# Allegro board io_4di_4aic.brd
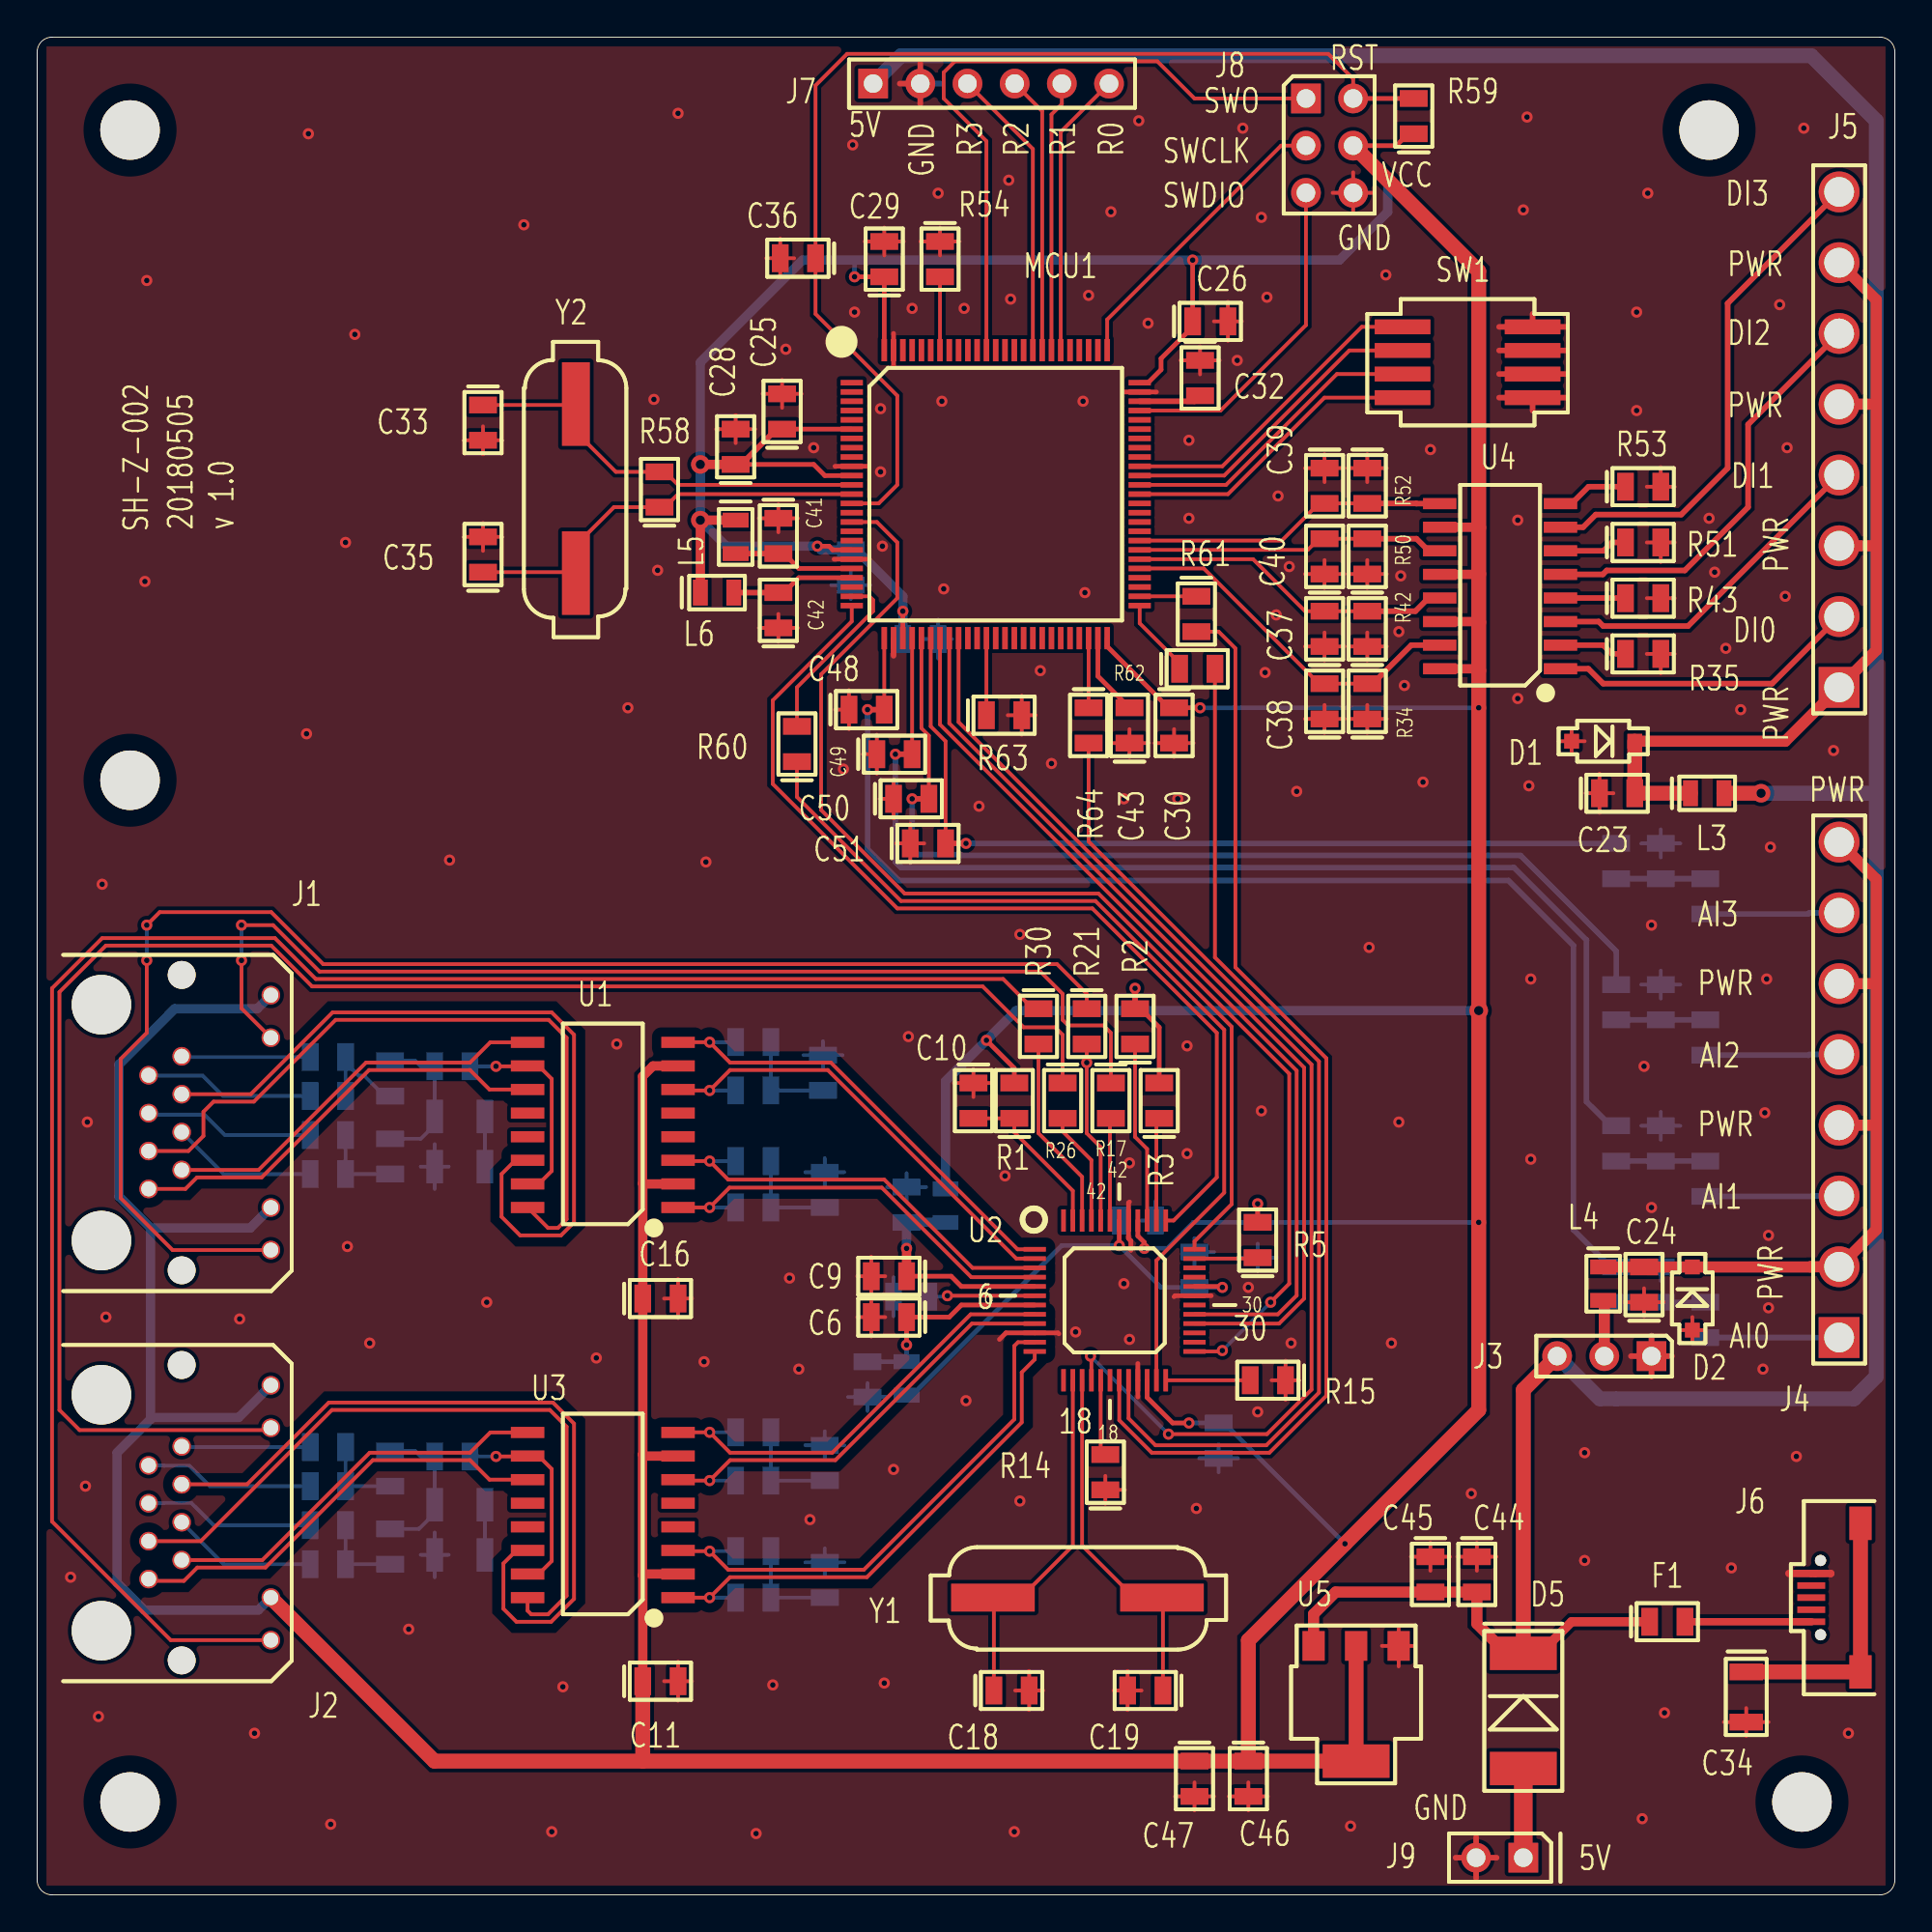
[diagram p0: board, top side]
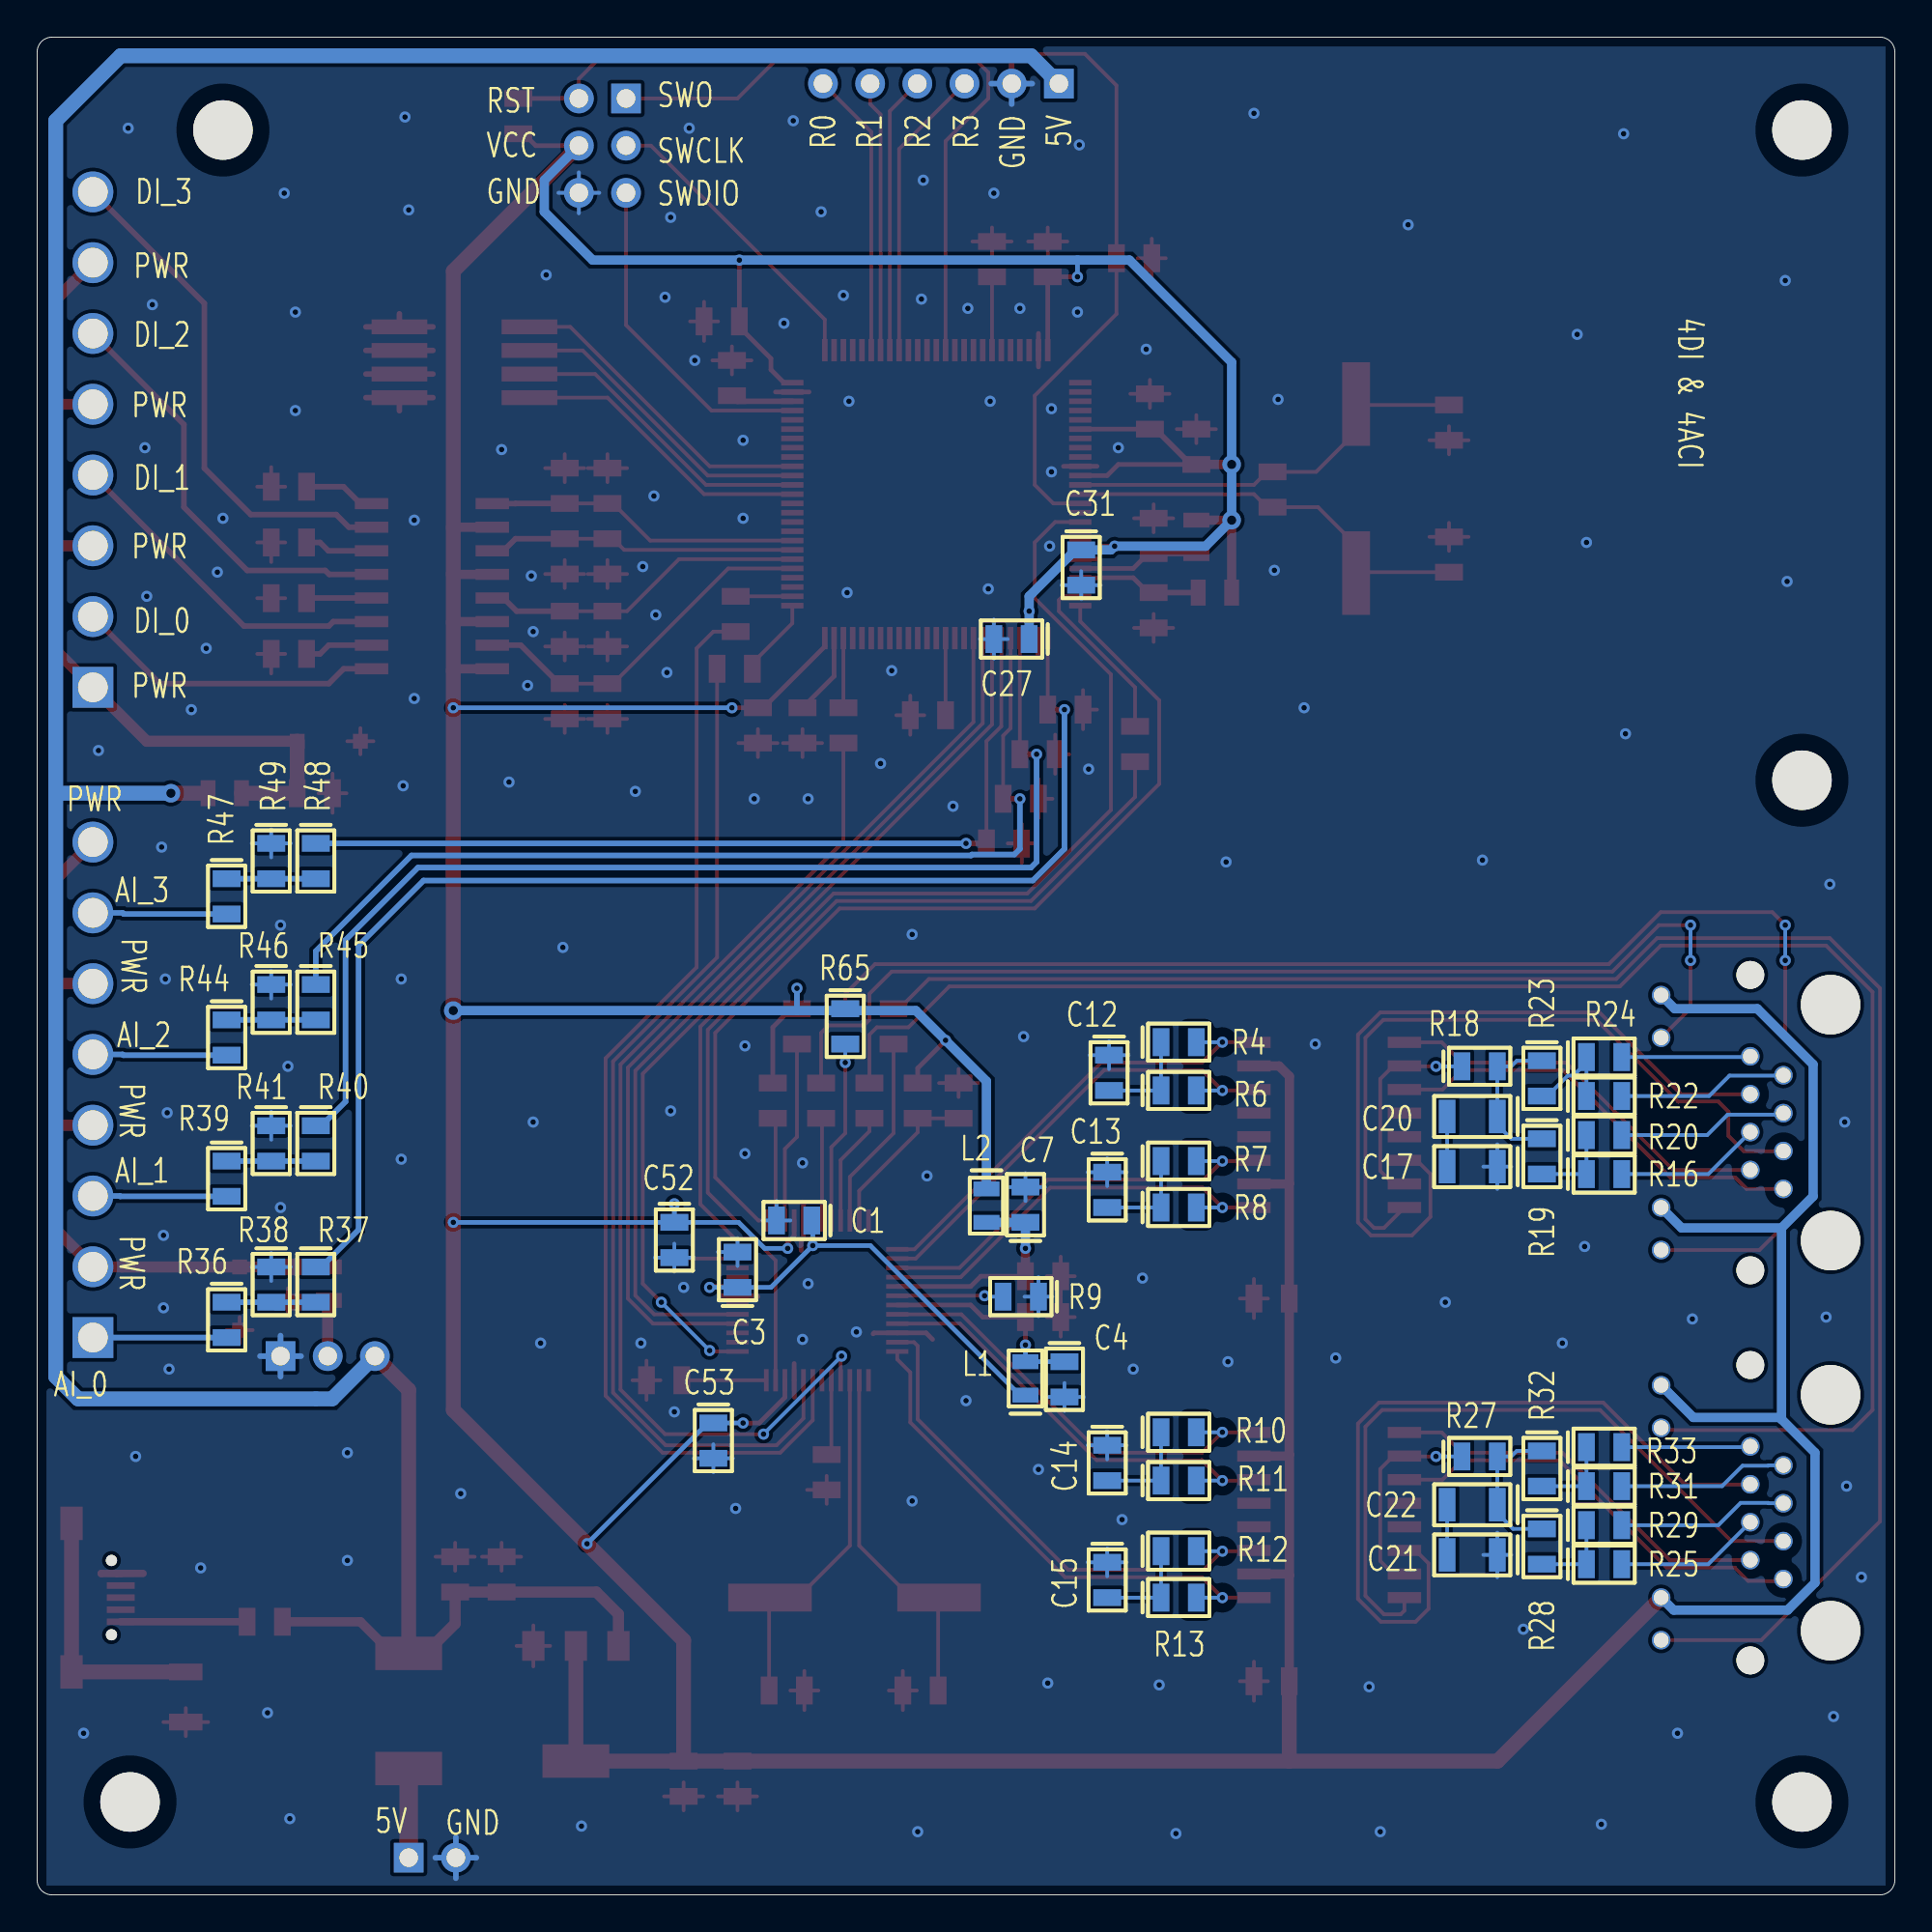
[diagram p1: board, bottom side, seen from below]

Outline 100 x 100 mm; copper layers: TOP, BOTTOM. Coordinates in mm from the lower left corner of the outline.
Outline path: 0,99.2 0,0.8 arc(0.23,0.23) 0.8,0 99.2,0 arc(99.77,0.23) 100,0.8 100,99.2 arc(99.77,99.77) 99.2,100 0.8,100 arc(0.23,99.77) 0,99.2

## Design rules (mm)
constraint set DEFAULT: pair gap 0.2
net group DP_RJ45_RX1: nets RX1M RX1P
net group DP_RJ45_RX2: nets RX2M RX2P
net group DP_RJ45_TX1: nets TX1M TX1P
net group DP_RJ45_TX2: nets TX2M TX2P
net group DP_RX1: nets RXM1 RXP1
net group DP_RX2: nets RXM2 RXP2
net group DP_TX1: nets TXM1 TXP1
net group DP_TX2: nets TXM2 TXP2

## Placement (name value [footprint] x y rotation side)
C1  47uF  [SMD_C_0805]  58.3 36.3 270 bottom
C3  100nF  [SMD_C_0805]  62.3 32.7 0 bottom
C4  47uF  [SMD_C_0805]  44.7 28.7 180 bottom
C6  100nF  [SMD_C_0805]  46.8 31.1 270 top
C7  47uF  [SMD_C_0805]  46.8 36.2 0 bottom
C9  100nF  [SMD_C_0805]  46.8 33.3 270 top
C10  100nF  [SMD_C_0805]  50.4 43.7 0 top
C11  10uF  [SMD_C_0805]  32.6 11.5 90 top
C12  100nF  [SMD_C_0805]  42.3 45.2 180 bottom
C13  100nF  [SMD_C_0805]  42.4 38.9 180 bottom
C14  100nF  [SMD_C_0805]  42.4 24.2 180 bottom
C15  100nF  [SMD_C_0805]  42.4 17.9 180 bottom
C16  10uF  [SMD_C_0805]  32.6 32.1 90 top
C17  1nF/2KV  [SMD_C_1206]  21.4 39.2 270 bottom
C18  18pF  [SMD_C_0805]  51.5 11 90 top
C19  18pF  [SMD_C_0805]  60.6 11 270 top
C20  1nF/2KV  [SMD_C_1206]  21.4 41.9 270 bottom
C21  1nF/2KV  [SMD_C_1206]  21.4 18.3 270 bottom
C22  1nF/2KV  [SMD_C_1206]  21.4 21 270 bottom
C23  100nF  [SMD_C_0805]  84.1 59.3 90 top
C24  100nF  [SMD_C_0805]  86.5 31.9 180 top
C25  100nF  [SMD_C_0805]  40.1 78.9 180 top
C26  100nF  [SMD_C_0805]  62.2 84.7 90 top
C27  100nF  [SMD_C_0805]  46.6 67.6 270 bottom
C28  100nF  [SMD_C_0805]  37.6 77 180 top
C29  100nF  [SMD_C_0805]  45.6 87.1 180 top
C30  100nF  [SMD_C_0805]  61.2 63.9 0 top
C31  100nF  [SMD_C_0805]  43.8 72.4 180 bottom
C32  10uF  [SMD_C_0805]  62.6 82.6 0 top
C33  22pF  [SMD_C_0805]  24 80.2 0 top
C34  1nF/2KV  [SMD_C_1206]  92 12 0 top
C35  22pF  [SMD_C_0805]  24 71.2 180 top
C36  100nF  [SMD_C_0805]  41.9 88.1 270 top
C37  100nF  [SMD_C_0805]  69.3 67.2 180 top
C38  100nF  [SMD_C_0805]  69.3 63.3 180 top
C39  100nF  [SMD_C_0805]  69.3 76.8 0 top
C40  100nF  [SMD_C_0805]  69.3 71.1 180 top
C41  100nF  [SMD_C_0805]  39.9 74.1 0 top
C42  100nF  [SMD_C_0805]  39.9 68.2 180 top
C43  10uF  [SMD_C_0805]  58.8 62 180 top
C44  100nF  [SMD_C_0805]  77.5 18.2 0 top
C45  10uF  [SMD_C_0805]  75 18.2 0 top
C46  47uF  [SMD_C_0805]  65.2 7.2 0 top
C47  47uF  [SMD_C_0805]  62.3 7.2 0 top
C48  100nF  [SMD_C_0805]  43.7 63.8 90 top
C49  100nF  [SMD_C_0805]  45.2 61.4 90 top
C50  100nF  [SMD_C_0805]  46.1 59 90 top
C51  100nF  [SMD_C_0805]  47 56.6 90 top
C52  100nF  [SMD_C_0805]  65.7 36.2 180 bottom
C53  100nF  [SMD_C_0805]  63.6 25.4 180 bottom
D1  5.1V  [SOD123]  86 62.1 270 top
D2  5.1V  [SOD123]  89.1 33.8 0 top
D5  1N5822  [DO-214AB]  80 13 0 top
F1  500mA  [SMD_R_0805]  86.8 14.7 90 top
J1  ETH1  [RJ45-T-568A-LED]  6 38 270 top
J2  ETH2  [RJ45-T-568A-LED]  6 17 270 top
J3  PWR_Select  [C1X3]  86.9 29 270 top
J4  4~20mA  [C1X8_P381]  97 30 180 top
J5  4~20mA  [C1X8_P381]  97 65 180 top
J6  USB_Socket  [MICROUSB_2FIX]  95.5 16 90 top
J7  Relay  [C1X6]  45 97.5 90 top
J8  SWD  [C2X3]  68.3 96.7 0 top
J9  PWR  [C1X2]  80 2 270 top
L1  bead  [SMD_L_0805]  46.8 26.9 0 bottom
L2  bead  [SMD_L_0805]  48.9 38 180 bottom
L3  bead  [SMD_L_0805]  89 59.3 90 top
L4  bead  [SMD_L_0805]  84.3 33.8 0 top
L5  bead  [SMD_L_0805]  37.6 74 0 top
L6  bead  [SMD_L_0805]  35.7 70.1 90 top
MCU1  STM32F407VET6  [LQFP100]  51.6 75.4 0 top
NOREF  -  [unnamed]  95 5 0 top
NOREF#2  -  [unnamed]  90 95 0 top
NOREF#3  -  [unnamed]  5 95 0 top
NOREF#4  -  [unnamed]  5 5 0 top
NOREF#5  -  [unnamed]  5 60 0 top
R1  10K  [SMD_R_0805]  52.6 41.8 180 top
R2  1K  [SMD_R_0805]  59.1 45.8 180 top
R3  1K  [SMD_R_0805]  60.4 41.8 180 top
R4  50R  [SMD_R_0805]  39.5 45.9 90 bottom
R5  4.7K  [SMD_R_0805]  65.7 34.3 180 top
R6  50R  [SMD_R_0805]  39.5 43.3 90 bottom
R7  50R  [SMD_R_0805]  39.5 39.5 90 bottom
R8  50R  [SMD_R_0805]  39.5 37 90 bottom
R9  11.8K/1%  [SMD_R_0805]  46.1 32.2 270 bottom
R10  50R  [SMD_R_0805]  39.5 24.9 90 bottom
R11  50R  [SMD_R_0805]  39.5 22.3 90 bottom
R12  50R  [SMD_R_0805]  39.5 18.5 90 bottom
R13  50R  [SMD_R_0805]  39.5 16 90 bottom
R14  1K  [SMD_R_0805]  57.5 21.8 180 top
R15  1K  [SMD_R_0805]  67.2 27.7 270 top
R16  50R  [SMD_R_0805]  16.6 38.8 90 bottom
R17  1K  [SMD_R_0805]  57.8 43.7 0 top
R18  75R  [SMD_R_0805]  23.3 44.6 90 bottom
R19  50R  [SMD_R_0805]  19 40.7 180 bottom
R20  50R  [SMD_R_0805]  16.6 40.9 90 bottom
R21  1K  [SMD_R_0805]  56.5 47.7 0 top
R22  50R  [SMD_R_0805]  16.6 43 90 bottom
R23  50R  [SMD_R_0805]  19 44.9 180 bottom
R24  50R  [SMD_R_0805]  16.6 45.1 90 bottom
R25  50R  [SMD_R_0805]  16.6 17.8 90 bottom
R26  1K  [SMD_R_0805]  55.2 43.7 0 top
R27  75R  [SMD_R_0805]  23.3 23.6 90 bottom
R28  50R  [SMD_R_0805]  19 19.7 180 bottom
R29  50R  [SMD_R_0805]  16.6 19.9 90 bottom
R30  1K  [SMD_R_0805]  53.9 47.7 0 top
R31  50R  [SMD_R_0805]  16.6 22 90 bottom
R32  50R  [SMD_R_0805]  19 23.9 180 bottom
R33  50R  [SMD_R_0805]  16.6 24.1 90 bottom
R34  2K  [SMD_R_0805]  71.6 63.3 180 top
R35  150R  [SMD_R_0805]  85.5 66.8 90 top
R36  50R  [SMD_R_0805]  89.8 31.9 180 bottom
R37  3K3  [SMD_R_0805]  85 33.8 180 bottom
R38  100R  [SMD_R_0805]  87.4 33.8 180 bottom
R39  50R  [SMD_R_0805]  89.8 39.5 180 bottom
R40  3K3  [SMD_R_0805]  85 41.4 180 bottom
R41  100R  [SMD_R_0805]  87.4 41.4 180 bottom
R42  2K  [SMD_R_0805]  71.6 67.2 180 top
R43  150R  [SMD_R_0805]  85.5 69.8 90 top
R44  50R  [SMD_R_0805]  89.8 47.1 180 bottom
R45  3K3  [SMD_R_0805]  85 49 180 bottom
R46  100R  [SMD_R_0805]  87.4 49 180 bottom
R47  50R  [SMD_R_0805]  89.8 54.7 180 bottom
R48  3K3  [SMD_R_0805]  85 56.6 180 bottom
R49  100R  [SMD_R_0805]  87.4 56.6 180 bottom
R50  2K  [SMD_R_0805]  71.6 71.1 180 top
R51  150R  [SMD_R_0805]  85.5 72.8 90 top
R52  2K  [SMD_R_0805]  71.6 76.8 0 top
R53  150R  [SMD_R_0805]  85.5 75.8 90 top
R54  10K  [SMD_R_0805]  48.6 89 0 top
R58  1M  [SMD_R_0805]  33.5 74.7 180 top
R59  10K  [SMD_R_0805]  74.1 94.8 180 top
R60  22R  [SMD_R_0805]  40.9 61 180 top
R61  22R  [SMD_R_0805]  62.4 69.9 0 top
R62  22R  [SMD_R_0805]  61.5 66 90 top
R63  10K  [SMD_R_0805]  51.1 63.5 90 top
R64  22R  [SMD_R_0805]  56.6 63.9 0 top
R65  4.7K  [SMD_R_0805]  56.5 47.7 180 bottom
SW1  reserved  [SMD_SW4]  77 82.5 0 top
U1  HR601680  [ETH_TRANS]  34.5 37 180 top
U2  KSZ8863RLL  [LQFP48]  58 32 0 top
U3  HR601680  [ETH_TRANS]  34.5 16 180 top
U4  PS2801-4/SM  [SOP16]  82 66 180 top
U5  AMS1117-33  [SOT-223]  71 10 180 top
Y1  25M  [CRYSTAL_2PIN_SMD]  56 16 180 top
Y2  8M  [CRYSTAL_2PIN_SMD]  29 75.7 90 top

## Library data of the parts
C1 C3 C4 C6 C7 C9 C10 C12-C15 C18 C19 C23-C33 C35-C53 = CAP NP
C11 C16 C17 C20-C22 C34 = CAP
D1 D2 = DIODE TVS
D5 = DIODE
F1 = FUSE
J1 J2 = RJ45-T-568A_1
J3 = C1X3
J4 J5 = C1X8Gen
J6 = MicroUSB_Socket
J7 = C1X6Gen
J8 = C2X3
J9 = C1X2
L1-L6 = INDUCTOR
MCU1 = STM32F407VET
R1-R54 R58-R65 = RESISTOR
SW1 = DIP_Switch4
U1 U3 = HR601680_1
U2 = KSZ8863RLL
U4 = PS2801-4/SM
U5 = AMS1117-33
Y1 Y2 = CRYSTAL

## Footprints (pads in the part's own frame, mm; a bottom-side part is the same pattern mirrored in y, then rotated)
C1X2
  rect 1.6x1.6 hole 1: 1(0,0)
  round 1.6 hole 1: 2(0,-2.54)
C1X3
  rect 1.6x1.6 hole 1: 1(0,0)
  round 1.6 hole 1: 2(0,-2.54) 3(0,-5.08)
C1X6
  rect 1.6x1.6 hole 1: 1(0,0)
  round 1.6 hole 1: 2(0,-2.54) 3(0,-5.08) 4(0,-7.62) 5(0,-10.16) 6(0,-12.7)
C1X8_P381
  rect 2.2x2.2 hole 1.6: 1(0,0)
  round 2.2 hole 1.6: 2(0,-3.81) 3(0,-7.62) 4(0,-11.43) 5(0,-15.24) 6(0,-19.05) 7(0,-22.86) 8(0,-26.67)
C2X3
  rect 1.6x1.6 hole 1: 1(0,0)
  round 1.6 hole 1: 2(0,-2.54) 3(0,-5.08) 4(2.54,-5.08) 5(2.54,-2.54) 6(2.54,0)
CRYSTAL_2PIN_SMD
  rect 4.5x1.5 smd: 1(-4.55,0) 2(4.55,0)
DO-214AB
  rect 3.6x1.8 smd: 1(0,0) 2(0,-6.2)
ETH_TRANS
  rect 1.8x0.6 smd: 1(0,0) 2(0,-1.27) 3(0,-2.54) 4(0,-3.81) 5(0,-5.08) 6(0,-6.35) 7(0,-7.62) 8(0,-8.89) 9(8.1,-8.89) 10(8.1,-7.62) 11(8.1,-6.35) 12(8.1,-5.08) 13(8.1,-3.81) 14(8.1,-2.54) 15(8.1,-1.27) 16(8.1,0)
LQFP48
  rect 1.2x0.25 smd: 1(-4.3,2.75) 2(-4.3,2.25) 3(-4.3,1.75) 4(-4.3,1.25) 5(-4.3,0.75) 6(-4.3,0.25) 7(-4.3,-0.25) 8(-4.3,-0.75) 9(-4.3,-1.25) 10(-4.3,-1.75) 11(-4.3,-2.25) 12(-4.3,-2.75) 25(4.3,-2.75) 26(4.3,-2.25) 27(4.3,-1.75) 28(4.3,-1.25) 29(4.3,-0.75) 30(4.3,-0.25) 31(4.3,0.25) 32(4.3,0.75) 33(4.3,1.25) 34(4.3,1.75) 35(4.3,2.25) 36(4.3,2.75)
  rect 0.25x1.2 smd: 13(-2.75,-4.3) 14(-2.25,-4.3) 15(-1.75,-4.3) 16(-1.25,-4.3) 17(-0.75,-4.3) 18(-0.25,-4.3) 19(0.25,-4.3) 20(0.75,-4.3) 21(1.25,-4.3) 22(1.75,-4.3) 23(2.25,-4.3) 24(2.75,-4.3) 37(2.75,4.3) 38(2.25,4.3) 39(1.75,4.3) 40(1.25,4.3) 41(0.75,4.3) 42(0.25,4.3) 43(-0.25,4.3) 44(-0.75,4.3) 45(-1.25,4.3) 46(-1.75,4.3) 47(-2.25,4.3) 48(-2.75,4.3)
LQFP100
  rect 1.2x0.3 smd: 1(-7.75,6) 2(-7.75,5.5) 3(-7.75,5) 4(-7.75,4.5) 5(-7.75,4) 6(-7.75,3.5) 7(-7.75,3) 8(-7.75,2.5) 9(-7.75,2) 10(-7.75,1.5) 11(-7.75,1) 12(-7.75,0.5) 13(-7.75,0) 14(-7.75,-0.5) 15(-7.75,-1) 16(-7.75,-1.5) 17(-7.75,-2) 18(-7.75,-2.5) 19(-7.75,-3) 20(-7.75,-3.5) 21(-7.75,-4) 22(-7.75,-4.5) 23(-7.75,-5) 24(-7.75,-5.5) 25(-7.75,-6) 51(7.75,-6) 52(7.75,-5.5) 53(7.75,-5) 54(7.75,-4.5) 55(7.75,-4) 56(7.75,-3.5) 57(7.75,-3) 58(7.75,-2.5) 59(7.75,-2) 60(7.75,-1.5) 61(7.75,-1) 62(7.75,-0.5) 63(7.75,0) 64(7.75,0.5) 65(7.75,1) 66(7.75,1.5) 67(7.75,2) 68(7.75,2.5) 69(7.75,3) 70(7.75,3.5) 71(7.75,4) 72(7.75,4.5) 73(7.75,5) 74(7.75,5.5) 75(7.75,6)
  rect 0.3x1.2 smd: 26(-6,-7.75) 27(-5.5,-7.75) 28(-5,-7.75) 29(-4.5,-7.75) 30(-4,-7.75) 31(-3.5,-7.75) 32(-3,-7.75) 33(-2.5,-7.75) 34(-2,-7.75) 35(-1.5,-7.75) 36(-1,-7.75) 37(-0.5,-7.75) 38(0,-7.75) 39(0.5,-7.75) 40(1,-7.75) 41(1.5,-7.75) 42(2,-7.75) 43(2.5,-7.75) 44(3,-7.75) 45(3.5,-7.75) 46(4,-7.75) 47(4.5,-7.75) 48(5,-7.75) 49(5.5,-7.75) 50(6,-7.75) 76(6,7.75) 77(5.5,7.75) 78(5,7.75) 79(4.5,7.75) 80(4,7.75) 81(3.5,7.75) 82(3,7.75) 83(2.5,7.75) 84(2,7.75) 85(1.5,7.75) 86(1,7.75) 87(0.5,7.75) 88(0,7.75) 89(-0.5,7.75) 90(-1,7.75) 91(-1.5,7.75) 92(-2,7.75) 93(-2.5,7.75) 94(-3,7.75) 95(-3.5,7.75) 96(-4,7.75) 97(-4.5,7.75) 98(-5,7.75) 99(-5.5,7.75) 100(-6,7.75)
MICROUSB_2FIX
  round 0.6 hole 0.6 unplated: (-2,-0.5) (2,-0.5)
  rect 0.35x1.5 smd: 1(-1.3,0) 2(-0.65,0) 3(0,0) 4(0.65,0) 5(1.3,0)
  rect 1.8x1.2 smd: 6(4,-2.65) 7(-4,-2.65)
RJ45-T-568A-LED
  round 1.5 hole 1.5 unplated: (-11.52,1.78) (4.38,1.78)
  round 3.2 hole 3.2 unplated: (-9.92,-2.54) (2.78,-2.54)
  round 1 hole 0.8: 1(0,0) 2(-1.02,1.78) 3(-2.04,0) 4(-3.06,1.78) 5(-4.08,0) 6(-5.1,1.78) 7(-6.12,0) 8(-7.14,1.78) 9(3.29,6.58) 10(1,6.58) 11(-8.14,6.58) 12(-10.43,6.58)
SMD_C_0805
  rect 1.5x0.9 smd: 1(0,0) 2(0,-1.9)
SMD_C_1206
  rect 1.8x0.9 smd: 1(0,0) 2(0,-2.7)
SMD_L_0805
  rect 1.4x0.8 smd: 1(0,0) 2(0,-1.8)
SMD_R_0805
  rect 1.5x0.9 smd: 1(0,0) 2(0,-1.9)
SMD_SW4
  rect 3x0.8 smd: 1(-3.5,1.905) 2(-3.5,0.635) 3(-3.5,-0.635) 4(-3.5,-1.905) 5(3.5,-1.905) 6(3.5,-0.635) 7(3.5,0.635) 8(3.5,1.905)
SOD123
  rect 0.8x0.8 smd: 1(0,0) 2(0,-3.4)
SOP16
  rect 1.8x0.6 smd: 1(0,0) 2(0,-1.27) 3(0,-2.54) 4(0,-3.81) 5(0,-5.08) 6(0,-6.35) 7(0,-7.62) 8(0,-8.89) 9(6.5,-8.89) 10(6.5,-7.62) 11(6.5,-6.35) 12(6.5,-5.08) 13(6.5,-3.81) 14(6.5,-2.54) 15(6.5,-1.27) 16(6.5,0)
SOT-223
  rect 1.2x1.6 smd: 1(-2.29,-3.4) 2(0,-3.4) 3(2.29,-3.4)
  rect 3.6x1.8 smd: 4(0,2.8)
unnamed
  round 3.2 hole 3.2 unplated: (0,0)

## Nets
1.8V: C1.1 C3.1 L1.1 U2.32 U2.42
3.3V: C11.1 C16.1 C25.1 C26.1 C27.1 C28.1 C29.1 C30.1 C31.1 C46.1 C47.1 C52.1 C53.1 J1.10 J1.12 J2.10 J2.12 J8.5 L2.1 L5.1 L6.1 MCU1.6 MCU1.11 MCU1.19 MCU1.28 MCU1.50 MCU1.75 MCU1.100 R1.2 R2.2 R3.2 R5.2 R59.1 R65.1 U1.2 U1.7 U2.22 U2.40 U3.2 U3.7 U4.10 U4.12 U4.14 U4.16 U5.2 U5.4(VOUT#4)
5V: C44.2 C45.2 D5.1(K) F1.1 J3.3(C) J7.1 L3.2 U5.3
GND: C1.2 C3.2 C4.2 C6.2 C7.2 C9.2 C10.1 C11.2 C12.1 C13.1 C14.1 C15.1 C16.2 C17.1 C18.2 C19.2 C21.1 C23.1 C24.1 C25.2 C26.2 C27.2 C28.2 C29.2 C30.2 C31.2 C32.1 C33.2 C34.2 C35.2 C36.2 C37.1 C38.1 C39.1 C40.1 C41.1 C42.1 C43.1 C44.1 C45.1 C46.2 C47.2 C48.1 C49.1 C50.1 C51.1 C52.2 C53.2 D1.2 D2.2 J3.1 J6.5 J7.2 J8.4 J9.2 MCU1.10 MCU1.20(VSSA) MCU1.27 MCU1.74 MCU1.99 R9.1 R14.1 R15.1 R34.1 R35.2 R38.1 R41.1 R42.1 R43.2 R46.1 R49.1 R50.1 R51.2 R52.1 R53.2 R54.1 R63.2 SW1.5 SW1.6 SW1.7 SW1.8 U2.10 U2.21 U2.31 U2.41 U5.1
GND_EARTH_1: C17.2 C20.2
GND_EARTH_2: C21.2 C22.2
VDDA: C42.2 L6.2 MCU1.22
VDDA_1.8: C4.1 C6.1 L1.2 U2.7
VDDA_3.3: C7.1 C9.1 L2.2 U2.5
AI_C_0: J4.1 R36.2
AI_C_0_CH_3: C48.2 MCU1.26 R37.1
AI_C_1: J4.3 R39.2
AI_C_1_CH_4: C49.2 MCU1.29 R40.1
AI_C_2: J4.5 R44.2
AI_C_2_CH_5: C50.2 MCU1.30 R45.1
AI_C_3: J4.7 R47.2
AI_C_3_CH_6: C51.2 MCU1.31 R48.1
AI_PWR_OUT: C24.2 D2.1(CATHODE) J4.2 J4.4 J4.6 J4.8 L4.1
CMT1: R18.1 U1.10 U1.15
CMT2: R27.1 U3.10 U3.15
DI_IN_0: J5.2 U4.1
DI_IN_1: J5.4 U4.3
DI_IN_2: J5.6 U4.5
DI_IN_3: J5.8 U4.7
DI_PWR_OUT: C23.2 D1.1(CATHODE) J5.1 J5.3 J5.5 J5.7 L3.1
DI_TTL_0: C38.2 MCU1.55 R34.2 U4.15
DI_TTL_1: C37.2 MCU1.56 R42.2 U4.13
DI_TTL_2: C40.2 MCU1.57 R50.2 U4.11
DI_TTL_3: C39.2 MCU1.58 R52.2 U4.9(EMITTER)
ETH1_LED0: R21.2 R65.2 U2.44
ETH1_LED1: R17.2 U2.43
ETH2_LED0: R30.2 U2.46
ETH2_LED1: R26.2 U2.45
ETH_CRS_DV: MCU1.32 U2.25
ETH_MDC: MCU1.16 U2.36
ETH_MDIO: MCU1.25 U2.37
ETH_REF_CLK: R60.1 U2.23
ETH_RXD0: MCU1.33 U2.29
ETH_RXD1: MCU1.34 U2.28
ETH_TX_EN: R64.2 U2.16
ETH_TXD0: R62.2 U2.20
ETH_TXD1: R61.2 U2.19
RELAY_0: J7.6 MCU1.81
RELAY_1: J7.5 MCU1.82
RELAY_2: J7.4 MCU1.83
RELAY_3: J7.3 MCU1.84
RST: C36.1 J8.6 MCU1.14 R59.2
RX1M: J1.2 U1.9
RX1P: J1.1 U1.11
RX2M: J2.2 U3.9
RX2P: J2.1 U3.11
RXM1: R4.2 U1.8 U2.1
RXM2: R10.2 U2.8 U3.8
RXP1: R6.2 U1.6 U2.2
RXP2: R11.2 U2.9 U3.6
SWCLK: J8.2 MCU1.76
SWDIO: J8.3 MCU1.72
SWO: J8.1 MCU1.89
TX1M: J1.6 U1.14(TX-)
TX1P: J1.3(TXP) U1.16
TX2M: J2.6 U3.14(TX-)
TX2P: J2.3(TXP) U3.16
TXM1: R7.2 U1.3 U2.3
TXM2: R12.2 U2.11 U3.3
TXP1: R8.2 U1.1 U2.4
TXP2: R13.2 U2.12 U3.1
VREF: C41.2 L5.2 MCU1.21
N3761335: R36.1 R37.2 R38.2
N3761583: R39.1 R40.2 R41.2
N3787419: J3.2 L4.2
N3788396: MCU1.94 R54.2
N3788604: C32.2 MCU1.73
N3788651: C43.2 MCU1.49
N3789744: R44.1 R45.2 R46.2
N3789822: R47.1 R48.2 R49.2
N3795822: C33.1 MCU1.12 R58.2 Y2.2
N3795840: C35.1 MCU1.13 R58.1 Y2.1
N3796397: MCU1.37 R63.1
N3796963: MCU1.48 R64.1
N3797842: MCU1.66 SW1.1
N3797848: MCU1.65 SW1.2
N3797854: MCU1.64 SW1.3
N3797860: MCU1.63 SW1.4(4ON)
N3803247: F1.2 J6.1
N3804187: C34.1 J6.6 J6.7
N4536254: D5.2 J9.1
N4537878: R35.1 U4.2
N4538644: R43.1 U4.4
N4538843: R53.1 U4.8
N4539052: R51.1 U4.6
N4543265: J1.4 R16.2
N4543297: J1.5 R20.2
N4543355: J1.7 R22.2
N4543361: J1.8 R24.2
N4543525: R16.1 R19.2 R20.1
N4543546: R22.1 R23.2 R24.1
N4543570: C20.1 R18.2 R19.1 R23.1
N4544407: R25.1 R28.2 R29.1
N4544437: C22.1 R27.2 R28.1 R32.1
N4544509: R31.1 R32.2 R33.1
N4544578: J2.4 R25.2
N4544586: J2.5 R29.2
N4544592: J2.7 R31.2
N4544600: J2.8 R33.2
N4545937: J1.11 R17.1
N4545941: J1.9 R21.1
N4545945: J2.11 R26.1
N4545949: J2.9 R30.1
N4547709: MCU1.51 R62.1
N4547713: MCU1.52 R61.1
N4547766: MCU1.24 R60.2
N4548481: R9.2 U2.6
N4551709: C18.1 U2.14 Y1.2
N4551745: C19.1 U2.15(X2) Y1.1
N4552613: R14.2 U2.17
N4553149: R15.2 U2.24
N4554278: R5.1 U2.35
N4554434: R2.1 U2.39
N4554438: R3.1 U2.38
N4554520: C12.2 R4.1 R6.1
N4554841: C13.2 R7.1 R8.1
N4555040: C14.2 R10.1 R11.1
N4555226: C15.2 R12.1 R13.1
N4558201: C10.2 R1.1 U2.47

Pads without a net: J6 2 3 4; MCU1 1 2 3 4 5 7 8 9 15 17 18 23 35 36 38 39 40 41 42 43 44 45 46 47 53 54 59 60 61 62 67 68 69 70 71 77 78 79 80 85 86 87 88 90 91 92 93 95 96 97 98; U1 4 5 12 13; U2 13 18 26 27 30 33 34 48; U3 4 5 12 13

## Via types
v1: diameter 1, hole 0.5, TOP to BOTTOM, 4 vias
v2: diameter 0.6, hole 0.3, TOP to BOTTOM, 179 vias

## Routing (per net, layer and track width the routed paths; a pad name or vN(x,y) marks a point on that pad's centre or on a via; arc(x,y) is an arc through that point)
1.8V: length 25.5
  TOP w0.25: v2(63.8,32.7) 63.75,32.75 U2.32 ; U2.42 v2(58.25,34.95)
  BOTTOM w0.25: L1.1 47.1,26.9 55.15,34.95 v2(58.25,34.95) ; v2(63.8,32.7) C3.1 60.5,32.7 v2(58.25,34.95) ; v2(58.25,34.95) 58.25,36.25 C1.1
3.3V: length 494.3
  TOP w0.25: v2(51.1,46) 52.6,44.5 R1.2 ; U2.22 59.75,26.77 61.12,25.4 v2(62,25.4) ; R3.2 60.4,46.7 59.4,47.7 R2.2 ; R5.2 v2(65.7,37.2) ; R59.1 73.8,94.8 73.16,94.16 J8.5 ; 37.9,77 41.8,77 42.4,76.4 MCU1.11 ; v2(59.6,34.8) 59.6,35.12 59.25,35.47 U2.40 ; MCU1.75 59.8,81.4 60.5,82.1 60.5,82.7 62.2,84.4 C26.1 v2(62.2,88) ; v2(62.6,63.9) C30.1 60.9,63.9 57.6,67.2 MCU1.50 ; MCU1.100 C29.1 v2(44,87.1) ; MCU1.6 40.3,78.9 ; MCU1.19 42.83,72.4 42.63,72.6 v2(42,72.6) ; MCU1.28 v2(46.6,69.1)
  TOP w0.3: v2(59.1,48.8) R2.2 ; C28.1 37.9,77 39.8,78.9 C25.1 40.3,78.9
  TOP w0.5: 77.6,65.9 77.5,66 U4.16 ; 32.59,23.7 32.59,17.2 ; 32.59,23.7 32.67,23.62 U3.7 ; 32.59,23.7 32.6,23.71 C16.1 32.6,38.29 ; 32.59,17.2 32.66,17.27 U3.2 ; 32.59,17.2 32.6,17.19 C11.1 ; L5.1 v1(35.7,74) L6.1 ; U1.2 32.62,38.27 32.6,38.29 ; 32.6,38.29 32.59,38.3 32.59,44.06 33.15,44.62 U1.7 ; C28.1 v1(35.7,77) ; 77.6,68.5 77.56,68.54 U4.14 ; 77.6,73.6 77.58,73.62 U4.10 ; 77.6,71.1 77.58,71.08 U4.12
  TOP w0.8: C46.1 U5.4 U5.2 ; C46.1 C47.1 32.6,7.2 ; C46.1 65.2,13.7 v2(70.4,18.9) 77.6,26.1 v2(77.6,36.2) v1(77.6,47.6) v2(77.6,63.9) 77.6,87.4 J8.5 ; C11.1 32.6,7.2 ; 32.6,7.2 21.38,7.2 J2.10
  BOTTOM w0.2: 56.52,47.6 56.5,47.62 R65.1
  BOTTOM w0.25: v2(70.4,18.9) 63.9,25.4 C53.1 v2(62,25.4) ; R5.2 v2(65.7,37.2) ; R5.2 62.24,36.2 60.84,34.8 v2(59.6,34.8) ; R5.2 v2(77.6,36.2) ; v2(44,87.1) 44,88 ; v2(62.6,63.9) v2(77.6,63.9)
  BOTTOM w0.3: v2(59.1,48.8) 59.1,47.6
  BOTTOM w0.5: J2.10 11.91,15.33 5.77,15.33 4.3,16.8 4.3,23.8 6.1,25.6 ; J1.12 11.85,47.7 7.4,47.7 4.4,44.7 4.4,37.6 6.1,35.9 ; J1.10 11.48,35.9 6.1,35.9 ; v1(77.6,47.6) 52.7,47.6 v2(51.1,46) 48.9,43.8 L2.1 ; 6.1,35.9 6.1,25.6 ; 6.1,25.6 6.2,25.7 10.85,25.7 J2.12 ; C27.1 v2(46.6,69.1) 46.6,69.9 44.1,72.4 C31.1 42.2,72.4 v2(42,72.6) 37.1,72.6 v1(35.7,74) v1(35.7,77) 35.7,82.5 41.2,88 v2(62.2,88) 70.1,88 72.7,90.6 72.7,92.3 J8.5
5V: length 190.6
  TOP w0.5: D5.1 80.9,13 82.6,14.7 F1.1
  TOP w0.6: D5.1 79.1,13 77.5,14.6 C44.2 C45.2 69.9,16.3 68.71,15.11 U5.3
  TOP w0.8: J3.3 80,27.18 D5.1 ; L3.2 v1(92.8,59.3)
  BOTTOM w0.8: 99,59.3 v1(92.8,59.3) ; 99,59.3 99,27.9 97.8,26.7 84.12,26.7 J3.3 ; 99,59.3 99,95.5 95.5,99 46.5,99 J7.1
GND: length 304.5
  TOP w0.2: 61.2,61.25 C30.2 ; C30.2 62.25,62 ; C30.2 61.2,62.75 ; C30.2 60.15,62 ; 72.39,13.4 U5.1 ; U5.1 73.29,12.3 ; U5.1 74.19,13.4 ; U5.1 73.29,14.5 ; 44.9,32.25 C9.2 ; C9.2 44.15,33.3 ; C9.2 44.9,34.35 ; C9.2 45.65,33.3 ; C24.1 86.5,32.65 ; C24.1 85.45,31.9 ; C24.1 87.55,31.9 ; C24.1 86.5,31.15 ; R52.1 71.6,77.55 ; R52.1 72.65,76.8 ; R52.1 70.55,76.8 ; R52.1 71.6,76.05 ; 61.55,82.6 C32.1 ; C32.1 63.65,82.6 ; C32.1 62.6,81.85 ; C32.1 62.6,83.35 ; 43.7,62.75 C48.1 ; C48.1 42.95,63.8 ; C48.1 43.7,64.85 ; 67.2,26.65 R15.1 ; R15.1 67.95,27.7 ; R15.1 67.2,28.75 ; R15.1 66.45,27.7 ; 22.95,73.1 C35.2 ; C35.2 25.05,73.1 ; C35.2 24,72.35 ; C35.2 24,73.85 ; R50.1 71.6,71.85 ; R50.1 72.65,71.1 ; R50.1 71.6,70.35 ; R50.1 70.55,71.1 ; C16.2 34.5,33.15 ; C16.2 33.75,32.1 ; C16.2 34.5,31.05 ; C16.2 35.25,32.1 ; C34.2 92,10.05 ; C34.2 92,8.55 ; C34.2 90.8,9.3 ; C34.2 93.2,9.3 ; C11.2 35.25,11.5 ; C11.2 34.5,10.45 ; C11.2 34.5,12.55 ; C11.2 33.75,11.5 ; R34.1 72.65,63.3 ; R34.1 70.55,63.3 ; R34.1 71.6,64.05 ; R34.1 71.6,62.55 ; C10.1 50.4,44.45 ; C10.1 51.45,43.7 ; C10.1 50.4,42.95 ; C10.1 49.35,43.7 ; C23.1 84.85,59.3 ; C23.1 84.1,60.35 ; C23.1 83.35,59.3 ; C23.1 84.1,58.25 ; 57.75,62 C43.1 ; C43.1 59.85,62 ; C43.1 58.8,62.75 ; C43.1 58.8,61.25 ; C51.1 47.75,56.6 ; C51.1 47,55.55 ; C51.1 46.25,56.6 ; C51.1 47,57.65 ; D1.2 83.3,62.1 ; D1.2 82.6,61.4 ; D1.2 81.9,62.1 ; D1.2 82.6,62.8 ; C50.1 46.1,60.05 ; C50.1 45.35,59 ; C50.1 46.1,57.95 ; 76.45,18.2 C44.1 ; C44.1 78.55,18.2 ; C44.1 77.5,17.45 ; C44.1 77.5,18.95 ; C41.1 40.95,74.1 ; C41.1 38.85,74.1 ; C41.1 39.9,73.35 ; C41.1 39.9,74.85 ; C18.2 54.15,11 ; C18.2 52.65,11 ; C18.2 53.4,9.95 ; C18.2 53.4,12.05 ; C39.1 70.35,76.8 ; C39.1 68.25,76.8 ; C39.1 69.3,77.55 ; C39.1 69.3,76.05 ; C36.2 40,89.15 ; C36.2 40,87.05 ; C36.2 40.75,88.1 ; C36.2 39.25,88.1 ; 45.6,88.25 C29.2 ; C29.2 46.65,89 ; C29.2 45.6,89.75 ; C29.2 44.55,89 ; R42.1 71.6,67.95 ; R42.1 71.6,66.45 ; R42.1 72.65,67.2 ; R42.1 70.55,67.2 ; 69.3,70.35 C40.1 ; C40.1 69.3,71.85 ; C40.1 70.35,71.1 ; C40.1 68.25,71.1 ; C38.1 70.35,63.3 ; C38.1 69.3,64.05 ; C38.1 69.3,62.55 ; C38.1 68.25,63.3 ; 38.85,68.2 C42.1 ; C42.1 39.9,68.95 ; C42.1 39.9,67.45 ; C42.1 40.95,68.2 ; C46.2 66.25,5.3 ; C46.2 64.15,5.3 ; C46.2 65.2,4.55 ; C46.2 65.2,6.05 ; 73.95,18.2 C45.1 ; C45.1 75,18.95 ; C45.1 76.05,18.2 ; C45.1 75,17.45 ; 58.7,9.95 C19.2 ; C19.2 57.95,11 ; C19.2 58.7,12.05 ; C19.2 59.45,11 ; C25.2 41.15,80.8 ; C25.2 40.1,80.05 ; C25.2 39.05,80.8 ; C25.2 40.1,81.55 ; C33.2 24,79.05 ; C33.2 22.95,78.3 ; C33.2 24,77.55 ; C33.2 25.05,78.3 ; 57.5,21.05 R14.1 ; R14.1 58.55,21.8 ; R14.1 57.5,22.55 ; R51.2 88.15,72.8 ; R51.2 86.65,72.8 ; R51.2 87.4,71.75 ; 36.55,78.9 C28.2 ; C28.2 37.6,78.15 ; C28.2 38.65,78.9 ; C28.2 37.6,79.65 ; 64.1,83.65 C26.2 ; C26.2 64.1,85.75 ; C26.2 64.85,84.7 ; C26.2 63.35,84.7 ; 86.65,66.8 R35.2 ; R35.2 87.4,65.75 ; R35.2 88.15,66.8 ; R54.1 48.6,89.75 ; R54.1 47.55,89 ; R54.1 48.6,88.25 ; R54.1 49.65,89 ; C47.2 63.35,5.3 ; C47.2 61.25,5.3 ; C47.2 62.3,6.05 ; C47.2 62.3,4.55 ; C6.2 45.65,31.1 ; C6.2 44.9,32.15 ; C6.2 44.15,31.1 ; C6.2 44.9,30.05 ; 45.2,60.35 C49.1 ; C49.1 44.45,61.4 ; C49.1 45.2,62.45 ; 69.74,91.62 J8.4 ; J8.4 70.84,92.72 ; J8.4 70.84,90.52 ; J8.4 71.94,91.62 ; C37.1 69.3,67.95 ; C37.1 68.25,67.2 ; C37.1 69.3,66.45 ; C37.1 70.35,67.2 ; R53.2 87.4,76.85 ; R53.2 86.65,75.8 ; R53.2 88.15,75.8 ; 86.65,69.8 R43.2 88.15,69.8 ; 52.25,63.5 R63.2 ; R63.2 53.75,63.5 ; R63.2 53,64.55 ; R63.2 53,62.45 ; D2.2 89.1,31.1 ; D2.2 89.8,30.4 ; D2.2 89.1,29.7 ; D2.2 88.4,30.4
  TOP w0.25: 58.45,80.9 MCU1.74 60.25,80.9 ; 44.75,76.9 MCU1.10 42.95,76.9 ; 63.2,32.25 U2.31 61.25,32.25 61.2,32.2 ; 55,30.2 54.95,30.25 U2.10 52.15,30.25 51.8,29.9 ; 58.8,37.3 58.75,37.25 U2.41 58.75,35.33 58.88,35.21 58.88,34.69 ; 46.1,82.25 MCU1.99 46.1,84.05 ; 44.8,71.9 MCU1.20 42.9,71.9 ; 59.25,28.6 U2.21 59.25,26.8
  TOP w0.3: SW1.8 78.7,84.41 ; SW1.8 82.3,84.41 ; SW1.8 80.5,85.11 ; MCU1.27 46.1,66.7 ; J7.2 47.54,96.4 ; J7.2 46.44,97.5 ; J7.2 47.54,98.6 ; J3.1 86.9,27.9 ; J3.1 85.8,29 ; J3.1 86.9,30.1 ; J3.1 88,29 ; J9.2 77.46,0.9 ; J9.2 78.56,2 ; J9.2 76.36,2 ; J9.2 77.46,3.1 ; SW1.5 82.3,80.59 ; SW1.5 80.5,79.89 ; SW1.5 78.7,80.59 ; 96.55,17.3 95.7,17.3 ; 78.7,83.14 SW1.7 82.3,83.14 ; 82.3,81.86 SW1.6 78.7,81.86
  TOP w0.4: 96.55,17.3 96.55,17.3 95.71,17.3 95.7,17.3 J6.5 94.3,17.3
  BOTTOM w0.2: 20.65,18.3 C21.1 ; C21.1 21.4,17.1 ; C21.1 22.15,18.3 ; C21.1 21.4,19.5 ; C52.2 66.75,34.3 ; C52.2 65.7,35.05 ; C52.2 65.7,33.55 ; C52.2 64.65,34.3 ; R41.1 87.4,42.15 ; R41.1 88.45,41.4 ; R41.1 86.35,41.4 ; R41.1 87.4,40.65 ; 62.3,33.85 C3.2 ; C3.2 63.35,34.6 ; C3.2 62.3,35.35 ; C12.1 42.3,45.95 ; C12.1 42.3,44.45 ; C12.1 43.35,45.2 ; C12.1 41.25,45.2 ; C14.1 42.4,24.95 ; C14.1 42.4,23.45 ; C14.1 41.35,24.2 ; C14.1 43.45,24.2 ; 45.35,32.2 R9.1 ; R9.1 46.1,31.15 ; R9.1 46.1,33.25 ; R9.1 46.85,32.2 ; R49.1 88.45,56.6 ; R49.1 87.4,55.85 ; R49.1 86.35,56.6 ; R49.1 87.4,57.35 ; R38.1 88.45,33.8 ; R38.1 87.4,33.05 ; R38.1 87.4,34.55 ; R38.1 86.35,33.8 ; C7.2 46.8,38.85 ; C7.2 46.8,37.35 ; C7.2 45.75,38.1 ; C7.2 47.85,38.1 ; 42.4,38.15 C13.1 ; C13.1 41.35,38.9 ; C13.1 43.45,38.9 ; C13.1 42.4,39.65 ; R46.1 88.45,49 ; R46.1 87.4,48.25 ; R46.1 87.4,49.75 ; R46.1 86.35,49 ; 41.35,17.9 C15.1 ; C15.1 42.4,18.65 ; C15.1 43.45,17.9 ; C15.1 42.4,17.15 ; 21.4,38 C17.1 ; C17.1 22.15,39.2 ; C17.1 20.65,39.2 ; C17.1 21.4,40.4 ; 42.75,70.5 C31.2 ; C31.2 43.8,69.75 ; C31.2 43.8,71.25 ; C31.2 44.85,70.5 ; C4.2 45.75,26.8 ; C4.2 44.7,26.05 ; C4.2 44.7,27.55 ; C4.2 43.65,26.8 ; 63.6,22.75 C53.2 ; C53.2 63.6,24.25 ; C53.2 64.65,23.5 ; C53.2 62.55,23.5 ; 48.5,66.55 C27.2 ; C27.2 48.5,68.65 ; C27.2 47.75,67.6 ; C27.2 49.25,67.6 ; 70.84,90.52 J8.4 ; J8.4 70.84,92.72 ; J8.4 69.74,91.62 ; J8.4 71.94,91.62 ; C1.2 60.2,37.35 ; C1.2 60.95,36.3 ; C1.2 59.45,36.3
  BOTTOM w0.3: J9.2 78.56,2 ; J9.2 77.46,0.9 ; J9.2 76.36,2 ; J9.2 77.46,3.1 ; J3.1 88,29 ; J3.1 86.9,30.1 ; J3.1 86.9,27.9 ; J3.1 85.8,29 ; J7.2 46.44,97.5 ; J7.2 47.54,96.4 ; J7.2 48.64,97.5
  vias: v2(1.8,17.1) v2(2.6,22) v2(2.7,41.6) v2(3.3,9.6) v2(3.5,54.4) v2(3.7,31.1) v2(5.8,70.7) v2(5.9,86.9) v2(10.9,31) v2(11.7,8.7) v2(14.5,62.5) v2(14.6,94.8) v2(15.8,3.8) v2(16.6,72.8) v2(16.7,34.9) v2(17.1,84) v2(17.9,29.7) v2(20,14.3) v2(22.2,55.7) v2(24.2,31.9) v2(26.2,89.9) v2(27.7,3.4) v2(28.3,11.2) v2(30.1,28.9) v2(31.2,45.8) v2(31.8,63.9) v2(33.2,80.5) v2(33.4,71.3) v2(34.5,95.9) v2(35.9,28.7) v2(36,55.6) v2(38.7,3.3) v2(39.6,11.3) v2(40.3,83.2) v2(40.5,33.2) v2(41,28.3) v2(41.6,20.2) v2(41.8,77.9) v2(43.4,60.6) v2(43.9,94.2) v2(44,85.2) v2(45.4,80) v2(45.4,76.6) v2(45.5,72.6) v2(45.6,11.4) v2(46.1,22.9) v2(46.9,46.2) v2(47.1,85.4) v2(48.5,91.6) v2(48.7,80.4) v2(48.8,70.3) v2(49.9,85.4) v2(50,26.6) v2(50.7,58.6) v2(52.1,38.7) v2(52.3,92.3) v2(52.4,85.9) v2(52.6,3.4) v2(52.9,51.7) v2(52.9,21.2) v2(54,65.9) v2(54.6,60.9) v2(55.9,30.3) v2(56.3,80.4) v2(56.4,70.1) v2(56.6,86.1) v2(57.8,90.6) v2(58.5,59) v2(58.5,32.9) v2(58.8,39.4) v2(58.8,29.9) v2(59.3,95.5) v2(59.8,84.6) v2(61.4,59) v2(61.9,45.7) v2(61.9,39.9) v2(62,78.3) v2(62,74.1) v2(62.4,20.8) v2(64.6,82.6) v2(64.9,95.1) v2(65.2,32.7) v2(65.7,26) v2(65.9,90.3) v2(65.9,42.2) v2(66.1,65.8) v2(66.2,86) v2(66.7,68.9) v2(66.8,75.3) v2(67.4,71.5) v2(67.5,29.7) v2(67.8,59.4) v2(70.7,3.7) v2(71.7,51) v2(72.6,87.2) v2(72.9,29.7) v2(73.3,68) v2(73.3,41.6) v2(73.4,71) v2(73.6,65.1) v2(74.6,59.9) v2(75,77.8) v2(77.2,21.6) v2(79.7,74) v2(79.7,64.4) v2(80,90.7) v2(80.2,95.7) v2(80.3,59.7) v2(80.4,49.3) v2(80.4,39.6) v2(83.3,23.8) v2(83.3,18) v2(86.1,85.2) v2(86.1,79.9) v2(86.4,4.1) v2(86.5,44.6) v2(86.7,91.6) v2(86.9,52.2) v2(86.9,37) v2(87.6,9.8) v2(90,74.1) v2(90.3,71.2) v2(90.9,67.1) v2(91.2,17.6) v2(91.7,63.8) v2(92.9,28.3) v2(93,42.1) v2(93.1,49.3) v2(93.2,35.5) v2(93.2,31.6) v2(93.3,56.4) v2(93.8,85.6) v2(94.1,69.9) v2(94.2,77.9) v2(94.7,23.6) v2(95.1,95.1) v2(96.7,61.6) v2(97.5,8.7)
GND_EARTH_1: length 2.7
  BOTTOM w0.2: C20.2 C17.2
GND_EARTH_2: length 2.7
  BOTTOM w0.2: C22.2 C21.2
VDDA: length 6.7
  TOP w0.25: MCU1.22 41,70.9 40.2,70.1 C42.2
  TOP w0.3: C42.2 L6.2
VDDA_1.8: length 11.7
  TOP w0.25: U2.7 49.75,31.75 49.1,31.1 C6.1 v2(46.8,29.6)
  BOTTOM w0.25: v2(46.8,29.6) L1.2 C4.1
VDDA_3.3: length 12.1
  TOP w0.25: C9.1 49.2,33.3 49.75,32.75 U2.5
  TOP w0.5: C9.1 v2(46.8,34.8)
  BOTTOM w0.5: L2.2 C7.1 v2(46.8,34.8)
AI_C_0: length 7.2
  BOTTOM w0.3: R36.2 J4.1
AI_C_0_CH_3: length 70.8
  TOP w0.2: MCU1.26 C48.2
  TOP w0.3: C48.2 v2(44.7,63.8)
  BOTTOM w0.3: v2(44.7,63.8) 44.7,56.3 46.4,54.6 79.2,54.6 82.7,51.1 82.7,35.8 84.7,33.8 R37.1
AI_C_1: length 7.2
  BOTTOM w0.3: J4.3 95.55,37.62 95.53,37.6 R39.2
AI_C_1_CH_4: length 62.7
  TOP w0.2: MCU1.29 C49.2
  TOP w0.3: C49.2 v2(46.2,61.4)
  BOTTOM w0.3: v2(46.2,61.4) 46.2,55.6 46.5,55.3 79.5,55.3 83.4,51.4 83.4,42.7 84.7,41.4 R40.1
AI_C_2: length 7.2
  BOTTOM w0.3: R44.2 95.36,45.2 95.4,45.24 J4.5
AI_C_2_CH_5: length 54.4
  TOP w0.2: MCU1.30 47.6,62.8 48,62.4 C50.2
  TOP w0.3: C50.2 v2(47.1,59)
  BOTTOM w0.3: R45.1 85,50.8 79.85,55.95 49.73,55.95 49.68,56 47.4,56 47.1,56.3 v2(47.1,59)
AI_C_3: length 7.2
  BOTTOM w0.3: J4.7 95.4,52.86 95.34,52.8 R47.2
AI_C_3_CH_6: length 47.5
  TOP w0.2: C51.2 48.9,62.1 48.1,62.9 MCU1.31
  TOP w0.3: C51.2 v2(50,56.6)
  BOTTOM w0.3: v2(50,56.6) R48.1
AI_PWR_OUT: length 41.3
  TOP w0.6: J4.8 99,54.67 99,49.1 ; 99,41.6 98.83,41.43 J4.4 ; 99,41.6 99,49.1 ; 99,41.6 99,35.81 J4.2 95.45,33.81 95.44,33.8 D2.1 C24.2 L4.1 ; J4.6 98.95,49.05 99,49.1
CMT1: length 11.2
  TOP w0.2: U1.15 27,38.27 27.7,38.97 27.7,43.92 27,44.62 U1.10 26.38,44.6 v2(24.7,44.6)
  BOTTOM w0.2: R18.1 v2(24.7,44.6)
CMT2: length 11.2
  TOP w0.2: v2(24.7,23.6) 26.38,23.6 U3.10 27,23.62 27.7,22.92 27.7,17.97 27,17.27 U3.15
  BOTTOM w0.2: R27.1 v2(24.7,23.6)
DI_IN_0: length 16.8
  TOP w0.3: U4.1 83.5,66 84.3,65.2 93.39,65.2 J5.2
DI_IN_1: length 18.5
  TOP w0.3: U4.3 84.06,68.54 84.3,68.3 88.87,68.3 J5.4
DI_IN_2: length 23
  TOP w0.3: U4.5 84.28,71.08 84.49,71.29 88.69,71.29 92.1,74.7 92.1,79.15 J5.6
DI_IN_3: length 27.7
  TOP w0.3: U4.7 83.22,73.62 83.9,74.3 88.5,74.3 91,76.8 91,85.67 J5.8
DI_PWR_OUT: length 46.6
  TOP w0.6: 99,80.3 98.94,80.24 J5.5 ; 99,80.3 99,85.86 J5.7 ; 99,80.3 99,72.5 ; 99,72.5 98.88,72.62 J5.3 ; 99,72.5 99,67 J5.1 94.1,62.1 D1.1
  TOP w0.8: L3.1 C23.2 D1.1
DI_TTL_0: length 19.6
  TOP w0.2: R34.2 C38.2 69,65.2 62.8,71.4 MCU1.55
  TOP w0.3: R34.2 71.9,65.2 73.97,67.27 U4.15
DI_TTL_1: length 17.6
  TOP w0.2: MCU1.56 65.45,71.9 68.25,69.1 C37.2 R42.2
  TOP w0.3: U4.13 74.9,69.81 74.19,69.1 R42.2
DI_TTL_2: length 16.7
  TOP w0.2: R50.2 C40.2 69,73 68.4,72.4 MCU1.57
  TOP w0.3: U4.11 74.9,72.35 74.25,73 R50.2
DI_TTL_3: length 17
  TOP w0.2: MCU1.58 67,72.9 69,74.9 C39.2 R52.2
  TOP w0.3: R52.2 74.24,74.9 74.25,74.89 U4.9
ETH1_LED0: length 10.8
  TOP w0.2: U2.44 57.25,40.25 56.5,41 v2(56.5,44.8) R21.2
  BOTTOM w0.2: v2(56.5,44.8) R21.2
ETH1_LED1: length 5.5
  TOP w0.2: U2.43 57.75,41.75 R17.2
ETH2_LED0: length 10.5
  TOP w0.2: R30.2 53.9,41 56.25,38.65 U2.46
ETH2_LED1: length 6.1
  TOP w0.2: U2.45 56.75,39.55 55.2,41.1 R26.2
ETH_CRS_DV: length 49.1
  TOP w0.2: MCU1.32 48.6,63 67.4,44.2 67.4,32.9 v2(66.4,31.9) ; v2(63.8,29.3) 63.75,29.25 U2.25
  BOTTOM w0.2: v2(66.4,31.9) v2(63.8,29.3)
ETH_MDC: length 58.7
  TOP w0.2: MCU1.16 45.2,73.9 46.3,72.8 46.3,69.8 42.2,65.7 42.2,58.4 46.7,53.9 57.13,53.9 64.3,46.73 64.3,37.17 62.3,35.17 U2.36
ETH_MDIO: length 52.3
  TOP w0.2: MCU1.25 43.85,68.55 39.6,64.3 39.6,59.8 46.3,53.1 56.8,53.1 63.5,46.4 63.5,38.62 61.17,36.3 U2.37
ETH_REF_CLK: length 50.5
  TOP w0.2: U2.23 60.25,34.15 63.9,37.8 63.9,46.57 56.97,53.5 46.5,53.5 40.9,59.1 R60.1
ETH_RXD0: length 49.1
  TOP w0.2: U2.29 66.78,31.25 67.8,32.27 67.8,44.37 49.1,63.07 MCU1.33
ETH_RXD1: length 49.7
  TOP w0.2: U2.28 66.85,30.75 68.2,32.1 68.2,44.53 49.6,63.13 MCU1.34
ETH_TX_EN: length 55.7
  TOP w0.2: v2(60.9,24.8) 66.2,24.8 68.6,27.2 68.6,44.7 56.6,56.7 R64.2 ; v2(56.7,29) 56.75,28.95 U2.16
  BOTTOM w0.2: v2(60.9,24.8) v2(56.7,29)
ETH_TXD0: length 55.4
  TOP w0.2: R62.2 63.4,50.46 69,44.86 69,27.03 66.17,24.2 60.2,24.2 58.75,25.65 U2.20
ETH_TXD1: length 60
  TOP w0.2: U2.19 58.25,25.55 60,23.8 66.33,23.8 69.4,26.87 69.4,45.03 64.5,49.93 64.5,67.1 63.6,68 R61.2
RELAY_0: length 15.4
  TOP w0.2: MCU1.81 55.1,94.9 J7.6
RELAY_1: length 14.6
  TOP w0.2: J7.5 55.16,96.4 54.6,95.84 MCU1.82
RELAY_2: length 15
  TOP w0.2: MCU1.83 54.1,96.02 J7.4
RELAY_3: length 15.8
  TOP w0.2: MCU1.84 53.6,93.98 J7.3
RST: length 60.7
  TOP w0.2: J8.6 70.84,97.76 69.5,99.1 43.6,99.1 41.9,97.4 C36.1 41.9,85.1 46.3,80.7 46.3,75.9 45.3,74.9 MCU1.14
  TOP w0.25: R59.2 J8.6
RX1M: length 21.5
  TOP w0.2: J1.2 11.92,39.02 17.7,44.8 23.3,44.8 24.39,45.89 U1.9
RX1P: length 23.5
  TOP w0.2: U1.11 24.35,43.35 23.3,44.4 17.87,44.4 12.09,38.62 8.6,38.62 7.98,38 J1.1
RX2M: length 21.5
  TOP w0.2: J2.2 12.12,18.02 17.9,23.8 23.3,23.8 24.39,24.89 U3.9
RX2P: length 23.6
  TOP w0.2: J2.1 6.1,16.9 7.9,16.9 8.62,17.62 12.29,17.62 18.07,23.4 23.3,23.4 24.35,22.35 U3.11
RXM1: length 25.2
  TOP w0.2: U2.1 52.77,34.75 42.72,44.8 37.3,44.8 v2(36.2,45.9) 34.51,45.9 U1.8
  BOTTOM w0.2: R4.2 v2(36.2,45.9)
RXM2: length 24.1
  TOP w0.2: U3.8 34.51,24.9 v2(36.2,24.9) 37.3,23.8 42.8,23.8 50.25,31.25 U2.8
  BOTTOM w0.2: R10.2 v2(36.2,24.9)
RXP1: length 25.3
  TOP w0.2: U2.2 52.71,34.25 42.56,44.4 37.3,44.4 v2(36.2,43.3) 34.55,43.3 U1.6
  BOTTOM w0.2: R6.2 v2(36.2,43.3)
RXP2: length 24.1
  TOP w0.2: U3.6 34.55,22.3 v2(36.2,22.3) 37.3,23.4 42.97,23.4 50.32,30.75 U2.9
  BOTTOM w0.2: R11.2 v2(36.2,22.3)
SWCLK: length 16.2
  TOP w0.2: MCU1.76 57.6,84.8 66.96,94.16 J8.2
SWDIO: length 18
  TOP w0.2: J8.3 68.3,84.5 63.7,79.9 MCU1.72
SWO: length 36.5
  TOP w0.2: MCU1.89 51.1,94.4 48.8,96.7 48.8,98.1 49.4,98.7 60.3,98.7 62.3,96.7 J8.1
TX1M: length 42.2
  TOP w0.2: U1.14 25.74,39.54 25,38.8 25,36.5 26,35.5 28.2,35.5 28.9,36.2 28.9,46.3 27.7,47.5 15.9,47.5 11.5,43.1 J1.6
TX1P: length 39.8
  TOP w0.2: 25.7,37 U1.16 27.5,35.9 28.03,35.9 28.5,36.37 28.5,46.13 27.53,47.1 16.07,47.1 11.67,42.7 9.5,42.7 8.95,42.15 8.95,40.85 8.14,40.04 J1.3
TX2M: length 41.5
  TOP w0.2: U3.14 25.8,18.54 25.1,17.84 25.1,15.4 25.8,14.7 27.67,14.7 28.9,15.93 28.9,25.37 27.77,26.5 15.7,26.5 11.3,22.1 J2.6
TX2P: length 38.2
  TOP w0.2: U3.16 26.4,15.3 26.6,15.1 27.5,15.1 28.5,16.1 28.5,25.2 27.6,26.1 15.87,26.1 8.81,19.04 J2.3
TXM1: length 23
  TOP w0.2: U1.3 34.54,39.5 v2(36.2,39.5) 37.2,38.5 45.6,38.5 50.35,33.75 U2.3
  BOTTOM w0.2: R7.2 v2(36.2,39.5)
TXM2: length 28.4
  TOP w0.2: U3.3 34.54,18.5 v2(36.2,18.5) 37.2,17.5 44.34,17.5 44.5,17.5 52.6,25.6 52.6,29.55 52.8,29.75 U2.11
  BOTTOM w0.2: R12.2 v2(36.2,18.5)
TXP1: length 23
  TOP w0.2: U2.4 50.28,33.25 45.46,38.07 37.27,38.07 v2(36.2,37) U1.1
  BOTTOM w0.2: R8.2 v2(36.2,37)
TXP2: length 27.9
  TOP w0.2: U3.1 v2(36.2,16) 37.3,17.1 44.66,17.1 53,25.43 53,28.12 53.7,28.82 U2.12
  BOTTOM w0.2: R13.2 v2(36.2,16)
VREF: length 6.6
  TOP w0.25: C41.2 40.2,72.2 41,71.4 MCU1.21
  TOP w0.3: C41.2 L5.2
N3761335: length 4.8
  BOTTOM w0.3: R37.2 R38.2 R36.1
N3761583: length 4.8
  BOTTOM w0.3: R40.2 R41.2 R39.1
N3787419: length 3
  TOP w0.6: J3.2 84.36,31.94 L4.2
N3788396: length 3.9
  TOP w0.2: MCU1.94 R54.2
N3788604: length 3.4
  TOP w0.3: MCU1.73 62.3,80.4 C32.2
N3788651: length 4.5
  TOP w0.25: MCU1.49 57.1,65.6 C43.2
N3789744: length 4.8
  BOTTOM w0.3: R44.1 R46.2 R45.2
N3789822: length 4.8
  BOTTOM w0.3: R48.2 R49.2 R47.1
N3795822: length 22.6
  TOP w0.2: MCU1.12 34.5,75.9 33.8,76.6 R58.2 31.15,76.6 29,78.75 Y2.2 28.95,80.2 C33.1
N3795840: length 22.5
  TOP w0.2: C35.1 28.95,71.2 Y2.1 29,72.65 31.05,74.7 R58.1 33.8,74.7 34.5,75.4 MCU1.13
N3796397: length 4.2
  TOP w0.2: R63.1 MCU1.37
N3796963: length 3.8
  TOP w0.2: MCU1.48 R64.1
N3797842: length 17.3
  TOP w0.2: SW1.1 71.3,84.41 63.8,76.9 MCU1.66
N3797848: length 16.9
  TOP w0.2: SW1.2 70.64,83.14 63.9,76.4 MCU1.65
N3797854: length 16.6
  TOP w0.2: MCU1.64 64,75.9 69.96,81.86 SW1.3
N3797860: length 16.3
  TOP w0.2: MCU1.63 64.1,75.4 69.3,80.59 SW1.4
N3803247: length 6.8
  TOP w0.4: J6.1 F1.2
N3804187: length 14.2
  TOP w0.8: J6.6 J6.7 C34.1
N4536254: length 4.8
  TOP w1: J9.1 D5.2
N4537878: length 3.7
  TOP w0.3: U4.2 84.3,67.27 84.77,66.8 R35.1
N4538644: length 3.5
  TOP w0.3: U4.4 85.49,69.81 R43.1
N4538843: length 3.9
  TOP w0.3: U4.8 82.6,74.89 83.51,75.8 R53.1
N4539052: length 3.7
  TOP w0.3: R51.1 84.77,72.8 84.32,72.35 U4.6
N4543265: length 7.9
  BOTTOM w0.2: R16.2 10.04,38.8 J1.4
N4543297: length 9.2
  BOTTOM w0.2: J1.5 6.08,42 9,42 10.1,40.9 R20.2
N4543355: length 9.2
  BOTTOM w0.2: R22.2 10,43 8.9,44.1 6.02,44.1 J1.7
N4543361: length 6.9
  BOTTOM w0.2: R24.2 7.82,45.1 J1.8
N4543525: length 4.5
  BOTTOM w0.2: R19.2 R16.1 R20.1
N4543546: length 5.2
  BOTTOM w0.2: R24.1 16.6,44.8 ; 16.6,44.8 R22.1 ; 16.6,44.8 17.3,44.1 17.6,44.1 18.7,43 R23.2
N4543570: length 8.4
  BOTTOM w0.2: R23.1 20.35,44.9 20.65,44.6 R18.2 C20.1 21.4,41.45 20.65,40.7 R19.1
N4544407: length 4.5
  BOTTOM w0.2: R29.1 R25.1 R28.2
N4544437: length 8.3
  BOTTOM w0.2: R32.1 20.35,23.9 20.65,23.6 R27.2 C22.1 21.4,20.55 20.55,19.7 R28.1
N4544509: length 4.5
  BOTTOM w0.2: R32.2 R31.1 R33.1
N4544578: length 7.9
  BOTTOM w0.2: J2.4 10.04,17.8 R25.2
N4544586: length 9.2
  BOTTOM w0.2: J2.5 6.8,21.08 6.82,21.1 8.3,21.1 9.5,19.9 R29.2
N4544592: length 9.2
  BOTTOM w0.2: R31.2 9.3,22 8.2,23.1 6.82,23.1 6.8,23.12 J2.7
N4544600: length 6.9
  BOTTOM w0.2: R33.2 7.82,24.1 J2.8
N4545937: length 59.4
  TOP w0.2: v2(11,52.2) 12.7,52.2 15.2,49.7 54,49.7 55.2,48.5 55.2,47.1 55.5,46.8 57.4,46.8 57.8,46.4 R17.1 ; v2(11,50.3) 11,47.72 J1.11
  BOTTOM w0.2: v2(11,50.3) v2(11,52.2)
N4545941: length 78
  TOP w0.2: J1.9 7.29,34.71 4.5,37.5 4.5,45 5.9,46.4 v2(5.9,50.3) ; R21.1 56.5,48.5 54.9,50.1 15.4,50.1 12.6,52.9 6.6,52.9 v2(5.9,52.2)
  BOTTOM w0.2: v2(5.9,50.3) v2(5.9,52.2)
N4545945: length 94
  TOP w0.2: J2.11 12.46,25.02 2.28,25.02 1.2,26.1 1.2,48.6 3.7,51.1 12.6,51.1 14.8,48.9 50.9,48.9 53.1,46.7 54.8,46.7 55.2,46.3 R26.1
N4545949: length 98.9
  TOP w0.2: J2.9 7.19,13.71 0.8,20.1 0.8,48.8 3.5,51.5 12.8,51.5 15,49.3 52,49.3 53.6,47.7 R30.1
N4547709: length 4.3
  TOP w0.2: R62.1 61.5,66.3 59.35,68.45 MCU1.51
N4547713: length 3
  TOP w0.2: MCU1.52 R61.1
N4547766: length 9.7
  TOP w0.2: MCU1.24 44.8,69.9 45,69.7 45,69.1 40.9,65 R60.2
N4548481: length 5.7
  TOP w0.2: U2.6 v2(49,32.25)
  BOTTOM w0.2: R9.2 48.95,32.2 v2(49,32.25)
N4551709: length 19.4
  TOP w0.2: U2.14 55.75,18.8 52.95,16 Y1.2 51.5,15.95 C18.1
N4551745: length 19.4
  TOP w0.2: U2.15 56.25,18.8 59.05,16 Y1.1 60.6,15.95 C19.1
N4552613: length 4.1
  TOP w0.2: U2.17 57.25,23.95 R14.2
N4553149: length 4.5
  TOP w0.2: U2.24 R15.2
N4554278: length 3.4
  TOP w0.2: U2.35 65.65,34.25 R5.1
N4554434: length 9.8
  TOP w0.2: R2.1 59.1,40.8 59.75,40.15 U2.39
N4554438: length 5.6
  TOP w0.2: R3.1 60.25,41.65 U2.38
N4554520: length 5.4
  BOTTOM w0.2: R4.1 R6.1 C12.2
N4554841: length 5.4
  BOTTOM w0.2: C13.2 R8.1 R7.1
N4555040: length 5.5
  BOTTOM w0.2: R10.1 R11.1 C14.2
N4555226: length 5.4
  BOTTOM w0.2: R12.1 R13.1 C15.2
N4558201: length 9
  TOP w0.2: C10.2 R1.1 52.6,41.05 55.75,37.9 U2.47

## Copper pours and planes (outline as drawn; the poured copper is in the pictures)
GND on TOP: 0.5,0.5 0.5,99.5 99.5,99.5 99.5,0.5 ; 36 cut-outs
GND on BOTTOM: 0.5,0.5 0.5,99.5 99.5,99.5 99.5,0.5 ; 7 cut-outs

## Text on the board
Ref Des/Silkscreen Bottom: SWO | SWCLK | SWDIO | RST | VCC | GND | 5V | DI_3 | PWR | DI_2 | DI_1 | DI_0 | AI_2 | AI_3 | AI_1 | AI_0 | 4DI & 4ACI | R3 | R2 | R1 | R0
Ref Des/Silkscreen Top: 5V | SWCLK | SWDIO | SWO | RST | GND | VCC | AI3 | PWR | AI2 | AI1 | DI3 | DI2 | AI0 | DI1 | DI0 | SH-Z-002 | 20180505 | v 1.0 | R3 | R2 | R1 | R0
NCLEGEND-1-2: FIGURE | FINISHED_SIZE | 0.3 | 0.5 | 0.8 | 1.0 | 1.6 | 0.6 | 1.5 | 3.2 | TOOL_SIZE | - | DRILL CHART: TOP to BOTTOM | ALL UNITS ARE IN MILLIMETERS | TOLERANCE_DRILL | +0.0/-0.0 | TOLERANCE_TRAVEL | PLATED | NON-PLATED | QTY | 179 | 4 | 24 | 17 | 14 | 2 | 9
